# Altium PCB Self_Sensing_Board_V1.PcbDoc
Units mil, origin at the board's own origin, x right, y up, seen from the top; angles counter-clockwise.
Board outline 1555 x 1275 mil, 2 copper layers (Top Layer, Bottom Layer); 40 components, 27 nets, 136 pads, 22 vias.
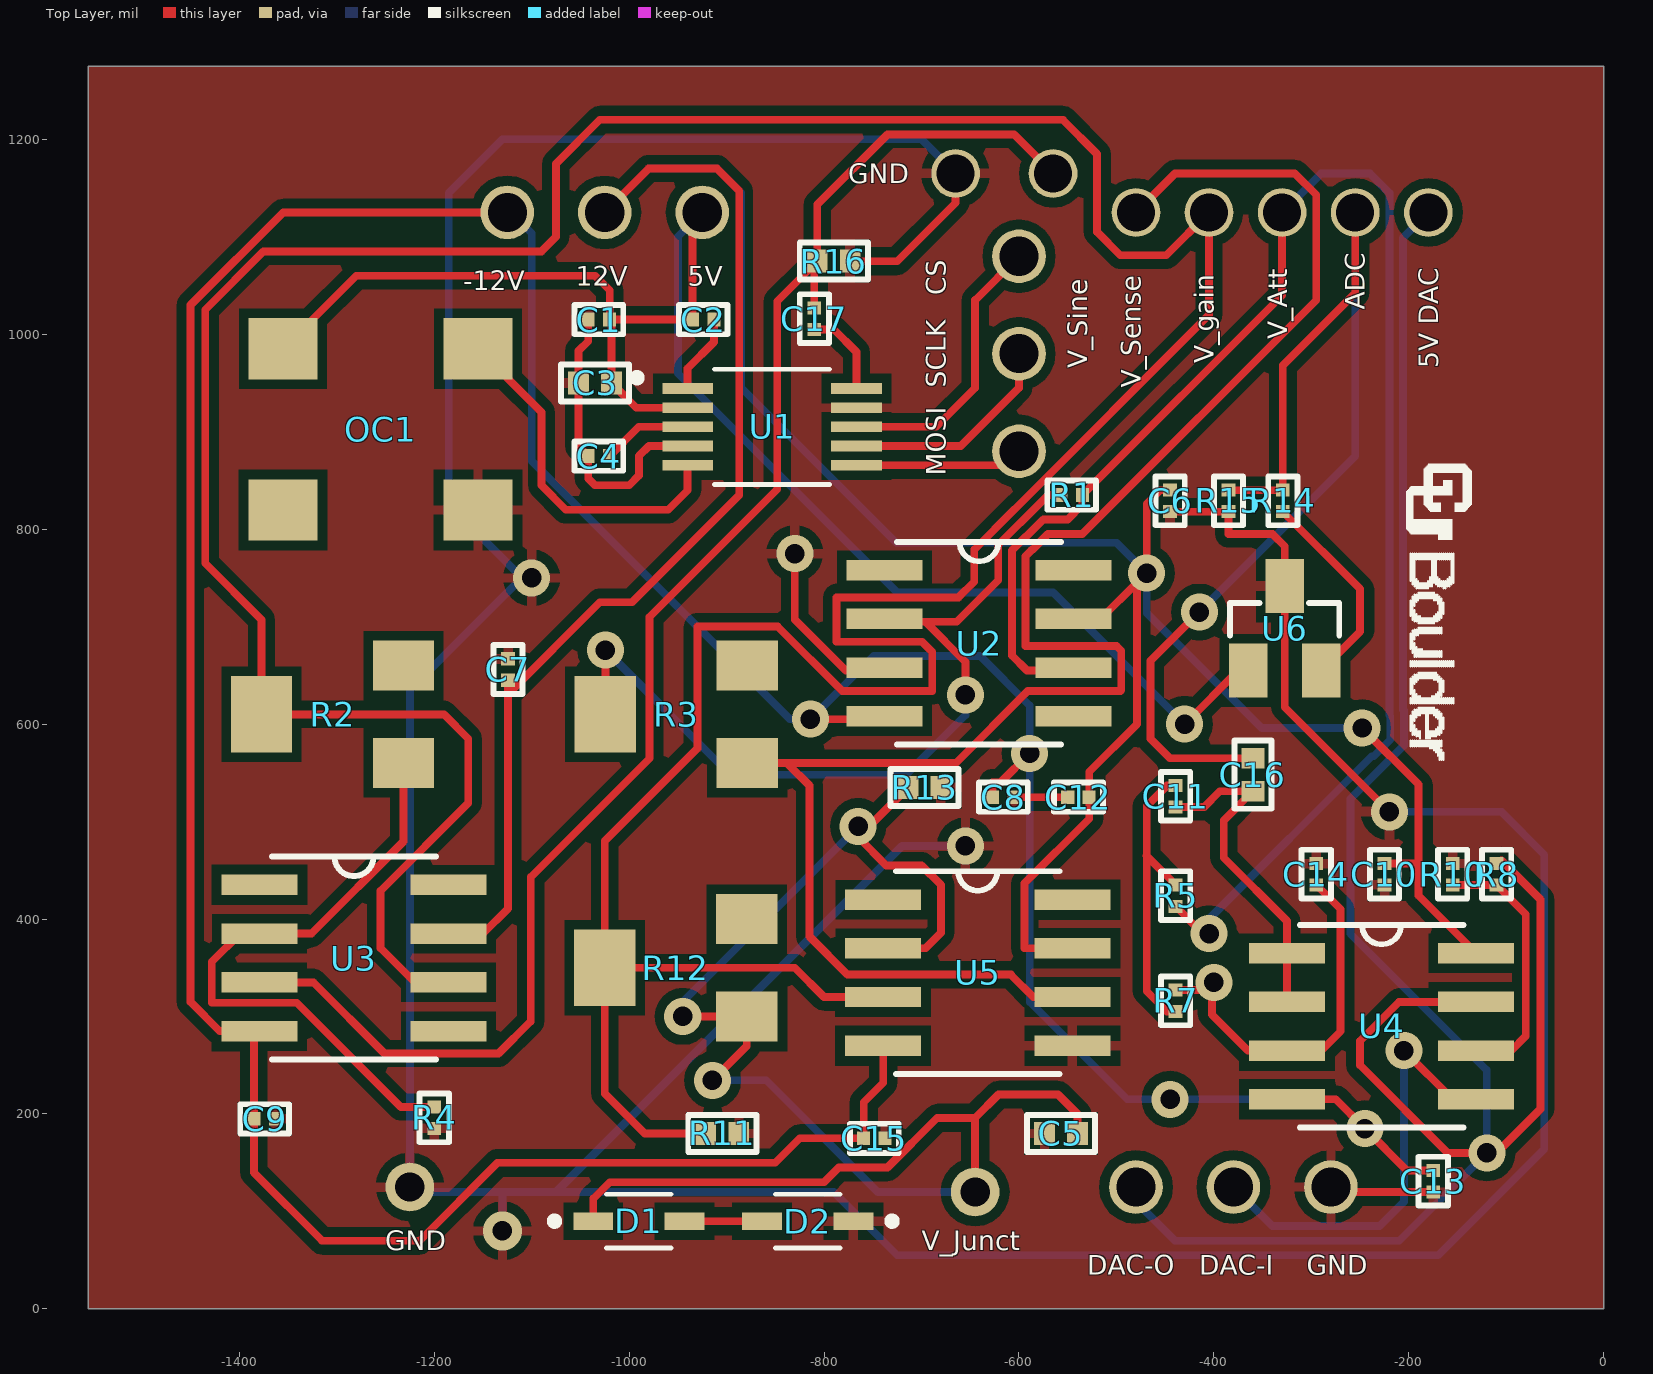
[diagram p0: Top Layer view]
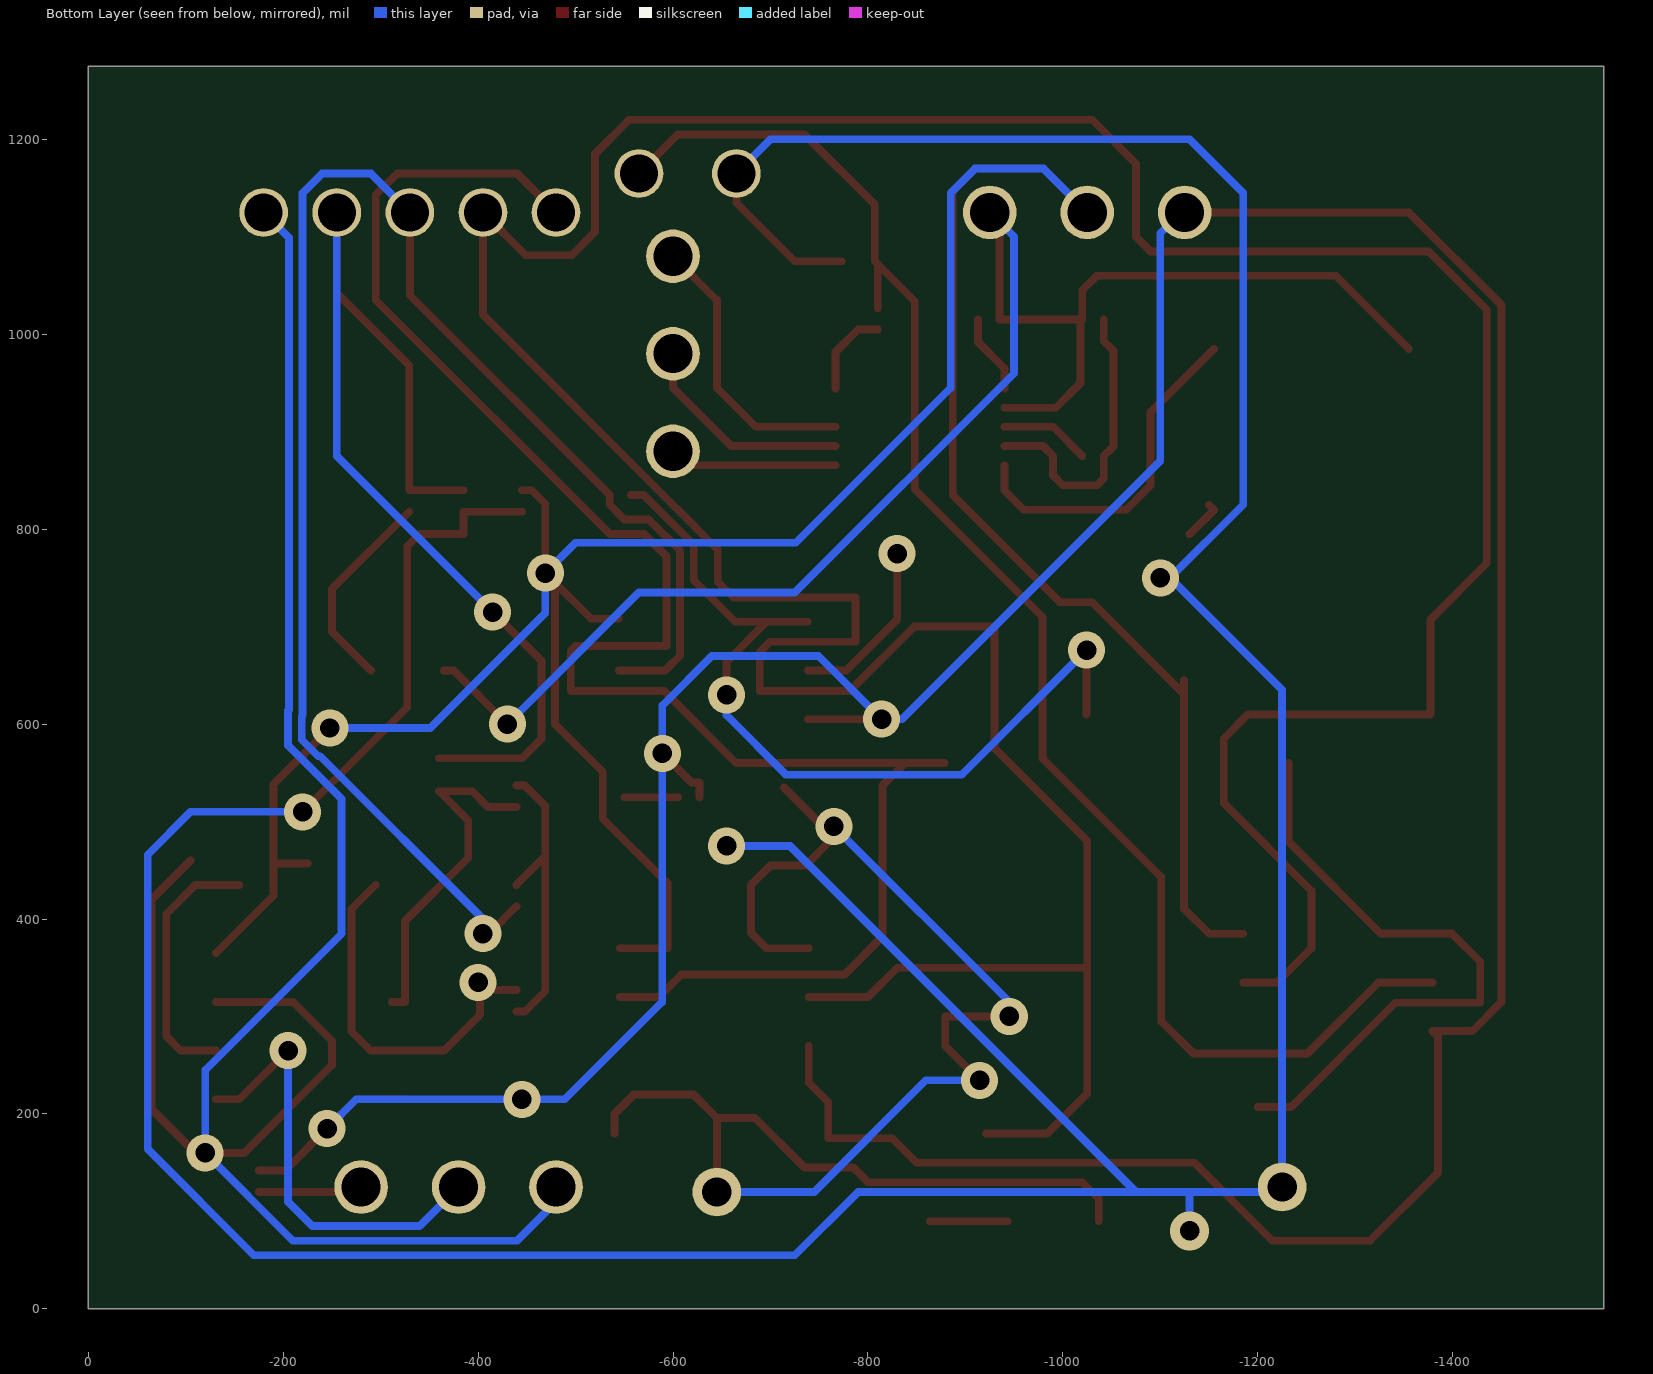
[diagram p1: Bottom Layer view, seen from below]

## Layer stack, top to bottom
Top Solder: solder mask 0.4, Solder Resist, Dk 3.5
Top Layer: signal copper 1.4
Dielectric 1: dielectric 12.6, FR-4, Dk 4.8
Bottom Layer: signal copper 1.4
Bottom Solder: solder mask 0.4, Solder Resist, Dk 3.5

## Board outline
-1555,0 0,0 0,1275 -1555,1275

## Design rules (kind name [scope] priority, off if disabled: settings)
Clearance "Copper Pour" [InPolygon] p1: gap=10 ignorepadtopadclearanceinfootprint=FALSE
Clearance [All] p2: gap=6 ignorepadtopadclearanceinfootprint=FALSE
PolygonConnect [All] p1: connectstyle=Relief reliefconductorwidth=10 reliefentries=4 polygonreliefangle="90 Angle" airgapwidth=10
RoutingVias [All] p1: holewidth=20 width=38 viastyle="Through Hole" minholewidth=20 minwidth=38 maxholewidth=20 maxwidth=38
SolderMaskExpansion [All] p1: expansion=4
Width [All] p1: maxlimit=8 minlimit=8 preferedwidth=8
30 further rules are at their usual default settings.

## Components (designator, comment, footprint, x,y, rotation, side; value= is the part's Value field where it differs from the comment)
C1 "CL03A104KA3NNNC" CL03A104KA3NNNC -706.02,1580 r180 top value=0.1uF
C2 "CL03B103KP3NNNC" CL03B103KP3NNNC -598.98,1580 r180 top value=0.01uF
C3 "GRM155R60J106ME47D" GRM155R60J106ME47D -1035,950 r180 top value=10uF
C4 "CL03A104KA3NNNC" CL03A104KA3NNNC -706.02,1440 r180 top value=0.1uF
C5 "GRM1555C1H330FA01D" GRM155R60J106ME47D -556.93,180 r0 top value=33pF
C6 "CL03A104KA3NNNC" CL03A104KA3NNNC 120,503.98 r90 top value=0.1uF
C7 "CL03A104KA3NNNC" CL03A104KA3NNNC -1689.33,981.02 r270 top value=0.1uF
C8 "CL03A104KA3NNNC" CL03A104KA3NNNC -941.02,-40 r0 top value=0.1uF
C9 "CL03A104KA3NNNC" CL03A104KA3NNNC -1698.98,-370 r0 top value=0.1uF
C10 "CL03A104KA3NNNC" CL03A104KA3NNNC -790,771.02 r270 top value=0.1uF
C11 "CL03B103KP3NNNC" CL03B103KP3NNNC 125.67,201.02 r90 top value=0.01uF
C12 "CL03A104KA3NNNC" CL03A104KA3NNNC -213.98,1090 r180 top value=0.1uF
C13 "CL03A104KA3NNNC" CL03A104KA3NNNC -740,456.02 r270 top value=0.1uF
C14 "CL03B103KP3NNNC" CL03B103KP3NNNC 270,121.02 r90 top value=0.01uF
C15 "CL03A104KA3NNNC" CL03A104KA3NNNC -1073.31,-390 r0 top value=0.1uF
C16 "GRM155R60J106ME47D" GRM155R60J106ME47D -360,548.07 r90 top value=10uF
C17 "CL03A104KA3NNNC" CL03A104KA3NNNC -245,691.02 r90 top value=10uF
D1 "DDZ9713S-7" SOD323 -990,90 r0 top
D2 "DDZ9713S-7" SOD323 -816.85,90 r180 top
OC1 "LFSPXO017735REEL" LFSPXO017735REEL -1355,985 r0 top value=10Mhz
R1 "RC0201FR-073K9L" RC0201FR-07130KL -221.02,1400 r180 top value=3.9k
R2 "SM-42TW204" SM-42TW503 -1304.33,610 r90 top
R3 "SM-42TW204" SM-42TW503 -951.5,610 r90 top
R4 "RC0201FR-073K9L" RC0201FR-07130KL -1765,521.02 r270 top value=3.9k
R5 "RC0603F202CS" RC0603F202CS 125.67,98.98 r90 top value=2K
R7 "RC0603F202CS" RC0603F202CS 125.67,-8.98 r90 top value=2K
R8 "RC0603F202CS" RC0603F202CS 455,121.02 r90 top value=2k
R10 "RC0201FR-073K9L" RC0201FR-07130KL -720,771.02 r270 top value=3.9k
R11 "CRCW04021M00DHEDP" CRCW04021M00DHEDP -904.33,180 r180 top value=1M
R12 "SM-42TW503" SM-42TW503 -952.16,350 r90 top
R13 "CRCW04021M00DHEDP" CRCW04021M00DHEDP -696.93,535 r180 top value=1M
R14 "RC0201FR-071KL" RC0603F202CS 235.67,503.98 r90 top value=1k
R15 "RC0201FR-071KL" RC0603F202CS -950,1153.98 r270 top value=1k
R16 "CRCW04021M00DHEDP" CRCW04021M00DHEDP -790,1075 r0 top value=2K
U1 "AD9833BRMZ" AD9833BRMZ -853.39,905 r0 top
U2 "LT1037CS8#PBF" LT1037CS8#PBF -645,690 r0 top value=15.85k
U3 "LT1037CS8#PBF" LT1037CS8#PBF -1286.33,367 r0 top value=15.85k
U4 "LT6011CS8" LT1037CS8#PBF -232,297 r0 top
U5 "INA129UA/2K5" INA129UA/2K5 -646.33,352 r0 top
U6 "ISL60002BIH311Z-TK" ISL60002-12 -327.4,698.31 r0 top

## Footprints (in the part's own frame and the unit in brackets; to place one, negate y for a bottom-side part, rotate by r counter-clockwise, add the part's x,y. Pads: shape width x height; smd on the part's side, far side on the other; paste and mask are expansions set on the pad)
AD9833BRMZ [mm]
  rect 1.32x0.28 smd: 1(-2.2,1) 2(-2.2,0.5) 3(-2.2,0) 4(-2.2,-0.5) 5(-2.2,-1) 6(2.2,-1) 7(2.2,-0.5) 8(2.2,0) 9(2.2,0.5) 10(2.2,1)
  silkscreen extent -3.62,-1.5 1.5,1.5, body extent -2.45,-1.5 2.45,1.5, height 1.15
CL03A104KA3NNNC [mm]
  rect 0.34x0.36 smd: 1(7.975,14.351) 2(8.535,14.351)
  silkscreen extent 7.62,13.97 8.89,14.73, body extent 7.96,14.2 8.56,14.5, height 0.3
CL03B103KP3NNNC [mm]
  rect 0.34x0.36 smd: 1(7.975,14.351) 2(8.535,14.351)
  silkscreen extent 7.62,13.97 8.89,14.73, body extent 7.96,14.2 8.56,14.5, height 0.3
CRCW04021M00DHEDP [mm]
  rect 0.54x0.6 smd: 1(-0.43,0) 2(0.43,0)
  silkscreen extent -0.89,-0.48 0.89,0.48, body extent -0.53,-0.28 0.52,0.27, height 0.55
GRM155R60J106ME47D [mm]
  rect 0.54x0.6 smd: 1(-0.43,0) 2(0.43,0)
  silkscreen extent -0.89,-0.48 0.89,0.48, body extent -0.53,-0.28 0.52,0.27, height 0.55
INA129UA/2K5 [mil]
  rect 78x21 smd: 1(-93,68) 2(-93,18) 3(-93,-32) 4(-93,-82) 5(101,-82) 6(101,-32) 7(101,18) 8(101,68)
  silkscreen extent -80,-111 88,97, body extent -118,-101 118,91, height 69
ISL60002-12 [mm]
  rect 1x1.4 smd: 1(-0.95,-1.1) 2(0.95,-1.1) 3(0,1.1)
  silkscreen extent -1.42,-0.19 1.42,0.66, body extent -1.42,-1.45 1.48,1.35, height 1.3
LFSPXO017735REEL [mil]
  rect 70.8x62.9 smd: 1(0,-165.3) 2(200,-165.3) 3(200,0) 4(0,0)
LT1037CS8#PBF [mil]
  rect 78x21 smd: 1(-93,68) 2(-93,18) 3(-93,-32) 4(-93,-82) 5(101,-82) 6(101,-32) 7(101,18) 8(101,68)
  silkscreen extent -80,-111 88,97, body extent -118,-101 118,91, height 69
RC0201FR-07130KL [mm]
  rect 0.34x0.36 smd: 1(7.975,14.351) 2(8.535,14.351)
  silkscreen extent 7.62,13.97 8.89,14.73, body extent 7.92,14.19 8.6,14.52, height 0.34
RC0603F202CS [mm]
  rect 0.34x0.36 smd: 1(7.975,14.351) 2(8.535,14.351)
  silkscreen extent 7.62,13.97 8.89,14.73, body extent 7.92,14.19 8.6,14.52, height 0.34
SM-42TW503 [mm]
  rect 1.3x1.6 smd: 1(-1.27,-1.85) 3(1.27,-1.85)
  rect 2x1.6 smd: 2(0,1.85)
  body extent -2.4,-1.95 2.4,1.95, height 5.28
SOD323 [mm]
  rect 1.04x0.46 smd: 1(-1.19,0) 2(1.19,0)
  silkscreen extent -2.3,-0.7 0.84,0.7

## Part data
C1 C4 C6 C7 C8 C9 C10 C12 C13 C15 C17: "CAP CER 0.1UF 25V X5R 0201", Digikey Part Number=1276-1318-6-ND, Manufacturer=Samsung, Package="0201 (0603 Metric)", Temperature Coefficient=X5R, Voltage Rated=25V, Manufacturer Part Number=CL03A104KA3NNNC, Supplier=Digikey, Unit Price=$0.75
C2 C11 C14: "CAP CER 10000PF 10V X7R 0201", Digikey Part Number=1276-1152-1-ND, Manufacturer=Samsung, Package="0201 (0603 Metric)", Temperature Coefficient=X7R, Voltage Rated=10V, Manufacturer Part Number=CL03B103KP3NNNC, Supplier=Digikey, Unit Price=0.13
C3 C16: "CAP CER 10UF 6.3V X5R 0402", Digikey Part Number=490-13239-1-ND, Manufacturer=Murata, Package="0402 (1005 Metric)", Temperature Coefficient=X5R, Voltage Rated=6.3V, Manufacturer Part Number=GRM155R60J106ME47D, Supplier=Digikey, Unit Price=$0.85
C5: "CAP CER 33PF 50V C0G/NP0 0402", Digikey Part Number=490-6231-1-ND, Manufacturer=Murata, Package="0402 (1005 Metric)", Temperature Coefficient=COG, Voltage Rated=50V, Manufacturer Part Number=GRM1555C1H330FA01D, Supplier=Digikey, Unit Price=$0.85
D1 D2: "DIODE ZENER 30V 200MW SOD323", Digikey Part Number=DDZ9713S-7DICT-ND, Manufacturer="Diodes Incorporated", Package="0201 (0603 Metric)", Manufacturer Part Number=DDZ9713S-7, Supplier=Digikey, Unit Price=$0.49, V Zener=30V
OC1: "XTAL OSC XO 10.0000MHZ HCMOS TTL", Digikey Part Number=1923-1091-1-ND, Manufacturer="IQD Frequency Products", Package=4-SMD, Manufacturer Part Number=LFSPXO017735REEL, Supplier=Digikey, Unit Price=1
R1 R4 R10: "RES SMD 3.9K OHM 1% 1/20W 0201", Digikey Part Number=YAG2655CT-ND, Manufacturer=Yageo, Package="0201 (0603 Metric)", Power (Watts)=0.05W, Manufacturer Part Number=RC0201FR-073K9L, Supplier=Digikey, Unit Price=0.1
R2 R3: "TRIMMER 200KOHM 0.25W J LEAD TOP", Digikey Part Number=SM-42TW204CT-ND, Manufacturer="Nidec Copal Electronics", Manufacturer Part Number=SM-42TW204, Unit Price=3.67, Vendor=Digikey
R5 R7: library part RC0201FR-071KL, "RES SMD 1K OHM 1% 1/20W 0201", Digikey Part Number=311-1KMCT-ND, Manufacturer=Yageo, Package="0201 (0603 Metric)", Power (Watts)=0.05W, Manufacturer Part Number=RC0201FR-071KL, Supplier=Digikey, Unit Price=0.1
R8: "RES SMD 2K OHM 1% 1/20W 0201", Digikey Part Number=1276-3633-1-ND, Manufacturer=Samsung, Package="0201 (0603 Metric)", Power (Watts)=0.05W, Manufacturer Part Number=RC0603F202CS, Supplier=Digikey, Unit Price=0.1
R11 R13 R16: "RES SMD 1M OHM 0.5% 1/16W 0402", Digikey Part Number=541-1.0MAVCT-ND, Manufacturer="Vishay Dale", Package=0402, Power (Watts)=0.063W, Manufacturer Part Number=CRCW04021M00DHEDP, Supplier=Digikey, Unit Price=0.3
R12: "TRIMMER 50K OHM 0.25W J LEAD TOP", Digikey Part Number=SM-42TW503CT-ND, Manufacturer="Nidec Copal Electronics", Manufacturer Part Number=SM-42TW503, Unit Price=3.67, Vendor=Digikey
R14 R15: "RES SMD 1K OHM 1% 1/20W 0201", Digikey Part Number=311-1KMCT-ND, Manufacturer=Yageo, Package="0201 (0603 Metric)", Power (Watts)=0.05W, Manufacturer Part Number=RC0201FR-071KL, Supplier=Digikey, Unit Price=0.1
U1: "Direct Digital Synthesizer 25MHz 1-DAC 10-Bit Serial 10-Pin MSOP Tube", Digikey Part Number=?AD9833BRMZ-ND?, Package="MSOP-10 Analog Devices", MF="Analog Devices", MP=AD9833BRMZ, Price=10.14
U2 U3: "IC OPAMP GP 60MHZ 8SO", Digikey Part Number=LT1037CS8#PBF-ND, Manufacturer="Linear Technology", Package=8-SOIC, Manufacturer Part Number=LT1037CS8#PBF, Supplier=Digikey, Unit Price=$4.23
U4: library part LT6011AIDD#PBF, "IC OPAMP GP 350KHZ RRO 8DFN", Digikey Part Number=LT6011AIDD#PBF-ND, Manufacturer="Analog Device", Package="8 DFN", Manufacturer Part Number=LT6011AIDD#PBF, Supplier=Digikey, Unit Price=$8.43
U5: "IC OPAMP INSTR 1.3MHZ 8SOIC", Digikey Part Number=296-26058-1-ND, Manufacturer="Texas Instruments", Package=8-SOIC, Manufacturer Part Number=INA129UA/2K5, Supplier=Digikey, Unit Price=$7.46
U6: "IC VREF SERIES 1.2V SOT23-3", Digikey Part Number=ISL60002BIH311Z-TKCT-ND, Manufacturer="Renesas Electronics", Package=SOT-23-3, Manufacturer Part Number=ISL60002BIH311Z-TK, Supplier=Digikey, Unit Price=$6.41

## Free pads (board coordinates)
  round 55 hole 40.15: 5(-600,880) 5(-600,1080) 6(-380,125) 7(-480,125) ""(-1125,1125) ""(-1025,1125) ""(-925,1125)
  round 55 hole 40: 5(-600,980) 8(-280,125)
  round 50 hole 39: 5(-565,1165) ""(-665,1165) ""(-480,1125) ""(-405,1125) ""(-330,1125) ""(-255,1125) ""(-180,1125)
  round 50 hole 30: ""(-1225,125) ""(-645,120)

## Via types
v1: diameter 38, hole 20, Top Layer to Bottom Layer, 21 vias
v2: diameter 40, hole 20, Top Layer to Bottom Layer, 1 vias

## Nets (pads, with @x,y where several pads share a name; then routed paths per layer and width w, separated by ;. In a path a pad name is that pad's centre, name@x,y a point inside that pad or via, vN(x,y) a via of type N, cw(c..) or ccw(c..) an arc to the next point about the centre after c; other vN are vias at no path point)
5V: C1.1 C2.2 C3.1 OC1.4 pad.@-925,1125 U1.2 U6.1 | length 1688.2
  Top Layer w8: OC1.4 -1280,1060 -1035,1060 -1020,1045 C1.1 ; U1.2 -992.76,924.69 C3.1 -1018.07,1013.07 C1.1 ; pad.@-925,1125 -935,1115 C2.2 C1.1 ; v1(-430,600) -375,655 U6.1
  Bottom Layer w8: pad.@-925,1125 -950,1100 -950,960 -725,735 -565,735 v1(-430,600)
12V: C6.2 C7.2 C10.1 C12.1 pad.@-1025,1125 U2.7 U3.7 U4.8 U5.7 | length 3263.3
  Top Layer w8: U3.7@-1185.16,384.84 -1150.16,384.84 -1124.33,410.67 -1124.33,630.67 ; C7.2 -1124.33,630.67 ; pad.@-1025,1125 -980,1170 -910,1170 -887,1147 -887,835 -997,725 -1030,725 -1124.33,630.67 ; U5.7 -594.33,370 -594.33,436.62 -527.95,503 C12.1 -527.95,551.05 -479,600 v1@-479,745 ; U2.7 -516,708 v1@-479,745 ; C6.2 -455,840 -469,826 v1(-469,755) v1@-479,745 ; v1(-248,596) -190,538 -190,460 ; C10.1 -192.95,457.05 -190,460 ; U4.8 -190,424 -190,460
  Bottom Layer w8: pad.@-1025,1125 -980,1170 -910,1170 -885,1145 -885,945 -726,786 -500,786 v1(-469,755) -469,714 -351,596 v1(-248,596)
-12V: C8.1 C9.1 C13.1 C15.1 pad.@-1125,1125 U2.4 U3.4 U4.4 U5.4 | length 4070.7
  Top Layer w8: pad.@-1121.45,1125 -1125,1125 -1355,1125 -1450,1030 -1450,315 -1420,285 U3.4 -1385,279.33 C9.1 -1385,140 -1315,70 -1215,70 -1135,150 -850,150 -825,175 C15.1 -759.33,212 -739.33,232 U5.4 ; v1(-814,605) U2.4@-738.33,605 ; C8.1 -627.05,540 -619,540 v1(-589,570) ; U4.4 -275,215 v1(-245,185) -202.05,142.05 C13.1
  Bottom Layer w8: pad.@-1121.45,1125 -1100,1103.55 -1100,870 -835,605 v1(-814,605) -749,670 -640,670 -589,619 v1(-589,570) -589,315 -489,215 v1(-445,215) -275,215 v1(-245,185)
GND: C1.2 C3.2 C4.2 C5.1 C6.1 C7.1 C8.2 C9.2 C10.2 C12.2 C13.2 C14.2 C15.2 D2.1 OC1.2 pad.8 pad.@-665,1165 pad.@-1225,125 R4.2 R10.1 R11.1 R13.1 R15.2 R16.2 U1.4 U1.9 U2.3 U5.5 U6.3 | length 5306.4
  Top Layer w8: OC1.2@-1149.7,825 OC1.2 OC1.2@-1130,794.7 ; C1.2 -1042.05,992.95 -1051.93,983.07 C3.2 -1051.93,884.88 C4.2 -1042.05,852.05 -1035,845 -1000,845 -990,855 -990,875 -979.68,885.32 U1.4 ; v1(-830,775) -830,707.37 -777.63,655 U2.3@-738.33,655 ; R16.2 -725,1075 -665,1135 pad.@-665,1165 ; C8.2 C12.2 ; C6.1 R15.2 -385,795 -340,795 -327.4,782.4 U6.3 -327.4,617.4 v1(-220,510) ; pad.8 -275,120 C13.2
  Bottom Layer w8: v2(-1130,80) -1130,120 ; v1(-1100,750) v1@-1110,750 ; pad.@-665,1165 -700,1200 -1130,1200 -1185,1145 -1185,825 v1@-1110,750 ; v1(-655,475) -720,475 -1075,120 ; v1(-220,510) -105,510 -61,466 -61,164 -170,55 -725,55 -790,120 -1075,120 ; -1130,120 -1220,120 -1225,125 -1225,635 v1@-1110,750 ; -1130,120 -1075,120
NetC2_1: C2.1 U1.1 | length 81.8
  Top Layer w8: U1.1 -940,965 -912.95,992.05 C2.1
NetC4_1: C4.1 U1.3 | length 92.4
  Top Layer w8: C4.1 -990,905 U1.3
NetC11_2: C11.2 R5.2 R7.1 | length 309
  Top Layer w8: -469.16,464.84 -469,464.67 ; R7.1 -448,305 -469,326 -469,464.67 ; R5.2 -469,464.67 ; C11.2 -448,537.05 -469,516.05 -469,464.67
NetC14_1: C14.1 R7.2 U4.3 | length 389.5
  Top Layer w8: R7.2 -410.05,327.05 -402.1,335 -402.1,302.1 -365,265 U4.3 -290,265 -270,285 -270,410 C14.1
  other v1: -400,335
NetC16_2: C16.2 pad.@-255,1125 R14.2 R15.1 | length 1111.7
  Top Layer w8: v1(-415,715) -465,665 -465,585 -445,565 C16.2 ; R15.1 R14.2 -329.33,968 -255,1042.33 pad.@-255,1125
  Bottom Layer w8: v1(-415,715) -255,875 pad.@-255,1125
NetC17_1: C17.1 U1.10 | length 90.3
  Top Layer w8: C17.1 -790,1005 -766.77,981.77 U1.10
NetD1_2: D1.2 D2.2 | length 79.4
  Top Layer w8: D1.2 D2.2
NetOC1_3: OC1.3 U1.5 | length 361.2
  Top Layer w8: OC1.3 -1090,920 -1090,845 -1065,820 -960,820 -940,840 U1.5
NetR1_2: R1.2 R3.2 U2.2 | length 883
  Top Layer w8: R3.2 v1(-1024.33,676) ; U2.2@-738.33,705 -696,705 ; v1(-655,630) -655,664 -696,705 ; R1.2 -570,835 -598.5,806.5 -598.74,806.5 -621.33,783.91 -621.33,747.67 -664,705 -696,705
  Bottom Layer w8: v1(-1024.33,676) -896.33,548 -716,548 -655,609 v1(-655,630)
NetR2_1: R2.1 R4.1 U3.2 | length 643.1
  Top Layer w8: R2.1 -1231.5,479.5 -1326,385 U3.2 -1399.33,385 -1428.33,356 -1428.33,314 -1341,314 -1234.05,207.05 R4.1
NetR8_1: R8.1 R10.2 U4.6 | length 269.6
  Top Layer w8: R10.2 R8.1 -80,405 -80,280 -95,265 U4.6
NetR8_2: pad.7 pad.@-180,1125 R8.2 U4.7 | length 2158.9
  Top Layer w8: U4.7 -210,315 -250,275 -250,250 -160,160 v1(-120,160) -110,160 -65,205 -65,420 R8.2@-105,460
  Bottom Layer w8: pad.7 -480,110 -440,70 -210,70 v1(-120,160) -120,245 -260,385 -260,523.19 -205,578.19 -205,613.81 -206,614.81 -206,1099 pad.@-180,1125
NetR14_1: R14.1 U6.2 | length 212.4
  Top Layer w8: R14.1 -250,738.62 -250,695 U6.2
NetU1_6: pad.5@-600,880 U1.6 | length 172.7
  Top Layer w8: U1.6 -614.37,865.63 pad.5@-600,880
NetU1_7: pad.5@-600,980 U1.7 | length 226.5
  Top Layer w8: U1.7 -659.68,885.32 -600,945 pad.5@-600,980
NetU1_8: pad.5@-600,1080 U1.8 | length 292
  Top Layer w8: U1.8 -685,905 -645,945 -645,1035 pad.5@-600,1080
NetU4_5: pad.6 U4.5 | length 451.6
  Top Layer w8: v1(-205,265) -155,215 U4.5
  Bottom Layer w8: pad.6 -340,85 -230,85 -205,110 v1(-205,265)
V_Att: pad.@-330,1125 R1.1 R5.1 U2.6 | length 1673.1
  Top Layer w8: U2.6@-544.33,655 -591.83,655 -607.33,670.5 -607.33,778.11 -592.94,792.5 -592.5,792.5 -575,810 -550,810 -535,825 R1.1 -330,1040 pad.@-330,1125 ; R5.1 -411.38,385 v1(-405,385)
  Bottom Layer w8: v1(-405,385) -405,400 -238,567 -235.99,567 -219,583.99 -219,608.01 -220,609.01 -220,1145 -240,1165 -290,1165 pad.@-330,1125
V_Filter: C11.1 C16.1 U4.1 U4.2 | length 355.1
  Top Layer w8: C11.1 -410,515 -393.86,531.14 C16.1 -390,501.14 -390,462.95 -325,397.95 U4.1 U4.2 U4.2@-311.36,315
V_Gain: pad.@-405,1125 R2.2 R11.2 R12.2 U3.6 U5.3 | length 4295.9
  Top Layer w8: U3.6 -1220,335 -1255,370 -1255,428.97 -1165,518.97 -1165,585 -1190,610 R2.2 -1377.16,707.16 -1435,765 -1435,1025.2 -1375.2,1085 -1090,1085 -1075,1100 -1075,1175 -1030,1220 -555,1220 -520,1185 -520,1105 -496,1081 -449,1081 -405,1125 -405,1020 -604.5,820.5 ; R11.2 -984,180 -1025,221 R12.2 ; U5.3 -800,320 -830,350 R12.2 ; -604.54,820.5 -646,779.04 -646,746 -662,730 -787.33,730 -787.33,684.5 -699.5,684.5 -689,674 -689,634 -781.43,634 -847.43,700 -930,700 -930,575 -1025,480 R12.2
V_Junct: C5.2 D1.1 pad.@-645,120 R12.1 R13.2 U5.2 | length 1704.4
  Top Layer w8: D1.1 -1036.85,113.15 -1020,130 -800,130 -785,145 -734.86,145 -683.91,195.95 -645,195.95 ; v1(-945,300) R12.1 -879.33,269.67 v1(-914.5,234.5) ; v1(-765,495) v1@-753.86,495 ; U5.2 -696,370 -680,386 -680,435 -700,455 -736.14,455 -765,483.86 v1@-753.86,495 ; R13.2 v1@-753.86,495 ; pad.@-645,120 -645,195.95 ; C5.2 -540,200 -560,220 -620.95,220 -645,195.95
  Bottom Layer w8: v1(-945,300) -945,315 v1(-765,495) ; v1(-914.5,234.5) -859.5,234.5 -745,120 pad.@-645,120
V_sense: pad.@-480,1125 R3.1 U5.6 | length 1856.2
  Top Layer w8: R3.1 -838,560 ; U5.6 -585.33,320 -608.33,343 -776,343 -815,382 -815,537 -838,560 ; pad.@-480,1125 -440,1165 -317,1165 -295,1143 -295,1035 -535,795 -570.2,795 -586.7,778.5 -587.14,778.5 -593.33,772.31 -593.33,680 -499.83,680 -495,675.17 -495,635 -496,634 -591,634 -665,560 -838,560
V_Sine: C17.2 pad.5@-565,1165 R16.1 U3.3 | length 1615.3
  Top Layer w8: U3.3 -1324,335 -1251,262 -1134,262 -1101,295 -1101,443 -979,565 -979,710 -848,841 -848,1033.93 R16.1@-810,1071.93 ; C17.2 R16.1@-810,1071.93 ; pad.5@-565,1165 -605,1205 -735,1205 -806.93,1133.07 R16.1 R16.1@-810,1071.93
pads on no net: OC1.1 R2.3 R3.3 R12.3 U2.1 U2.5 U2.8 U3.1 U3.5 U3.8 U5.1 U5.8

## Polygon pours and split planes (outlines as drawn)
GND on Top Layer "Top Layer-GND" (solid, pour order 100): -1555,0 -1555,1275 0,1275 0,0

## Silkscreen, mask and mechanical layers (free items; w line width, h text height)
Top Overlay:
  drawing of 363 lines, arcs and shapes, not listed
  text "GND" at -775,1155 h20
  text "12V" at -1055,1050 h20
  text "5V" at -940,1050 h20
  text "-12V" at -1170,1045 h20
  text "CS" at -675,1040 h20 r90
  text "ADC" at -245,1025 h20 r90
  text "V_Att" at -325,995 h20 r90
  text "V_gain" at -400,970 h20 r90
  text "V_Sine" at -530,965 h20 r90
  text "5V DAC" at -170,965 h20 r90
  text "SCLK" at -675,945 h20 r90
  text "V_Sense" at -475,945 h20 r90
  text "MOSI" at -675,855 h20 r90
  text "GND" at -1250,60 h20
  text "V_Junct" at -700,60 h20
  text "DAC-O" at -530,35 h20
  text "DAC-I" at -415,35 h20
  text "GND" at -305,35 h20
Mechanical 1:
  the board outline again, w10